# Altium PCB PCB_layer2.PcbDoc
Units mm, origin at the board's own origin, x right, y up, seen from the top; angles counter-clockwise.
Board outline 140.34 x 105.41 mm, 2 copper layers (Top Layer, Bottom Layer); 46 components, 0 nets, 202 pads, 95 vias.
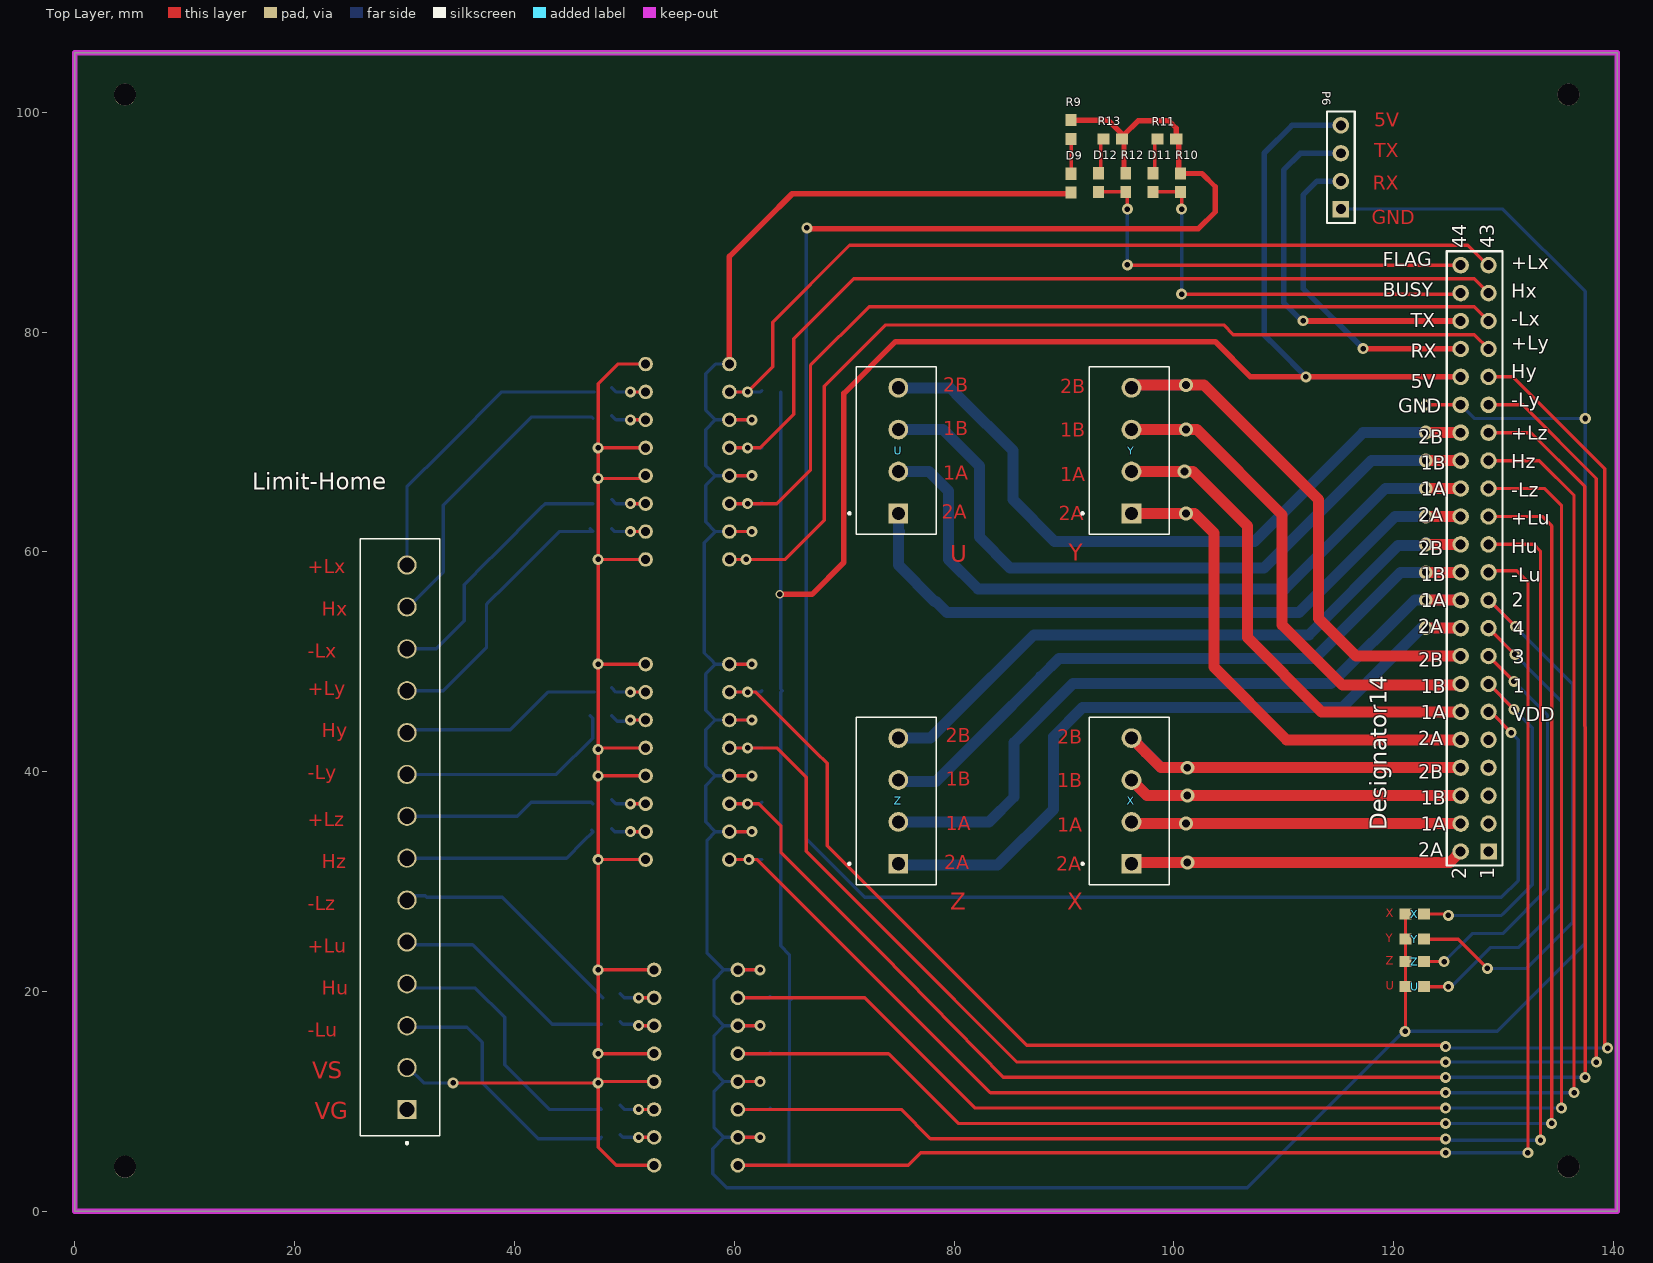
[diagram p0: Top Layer view]
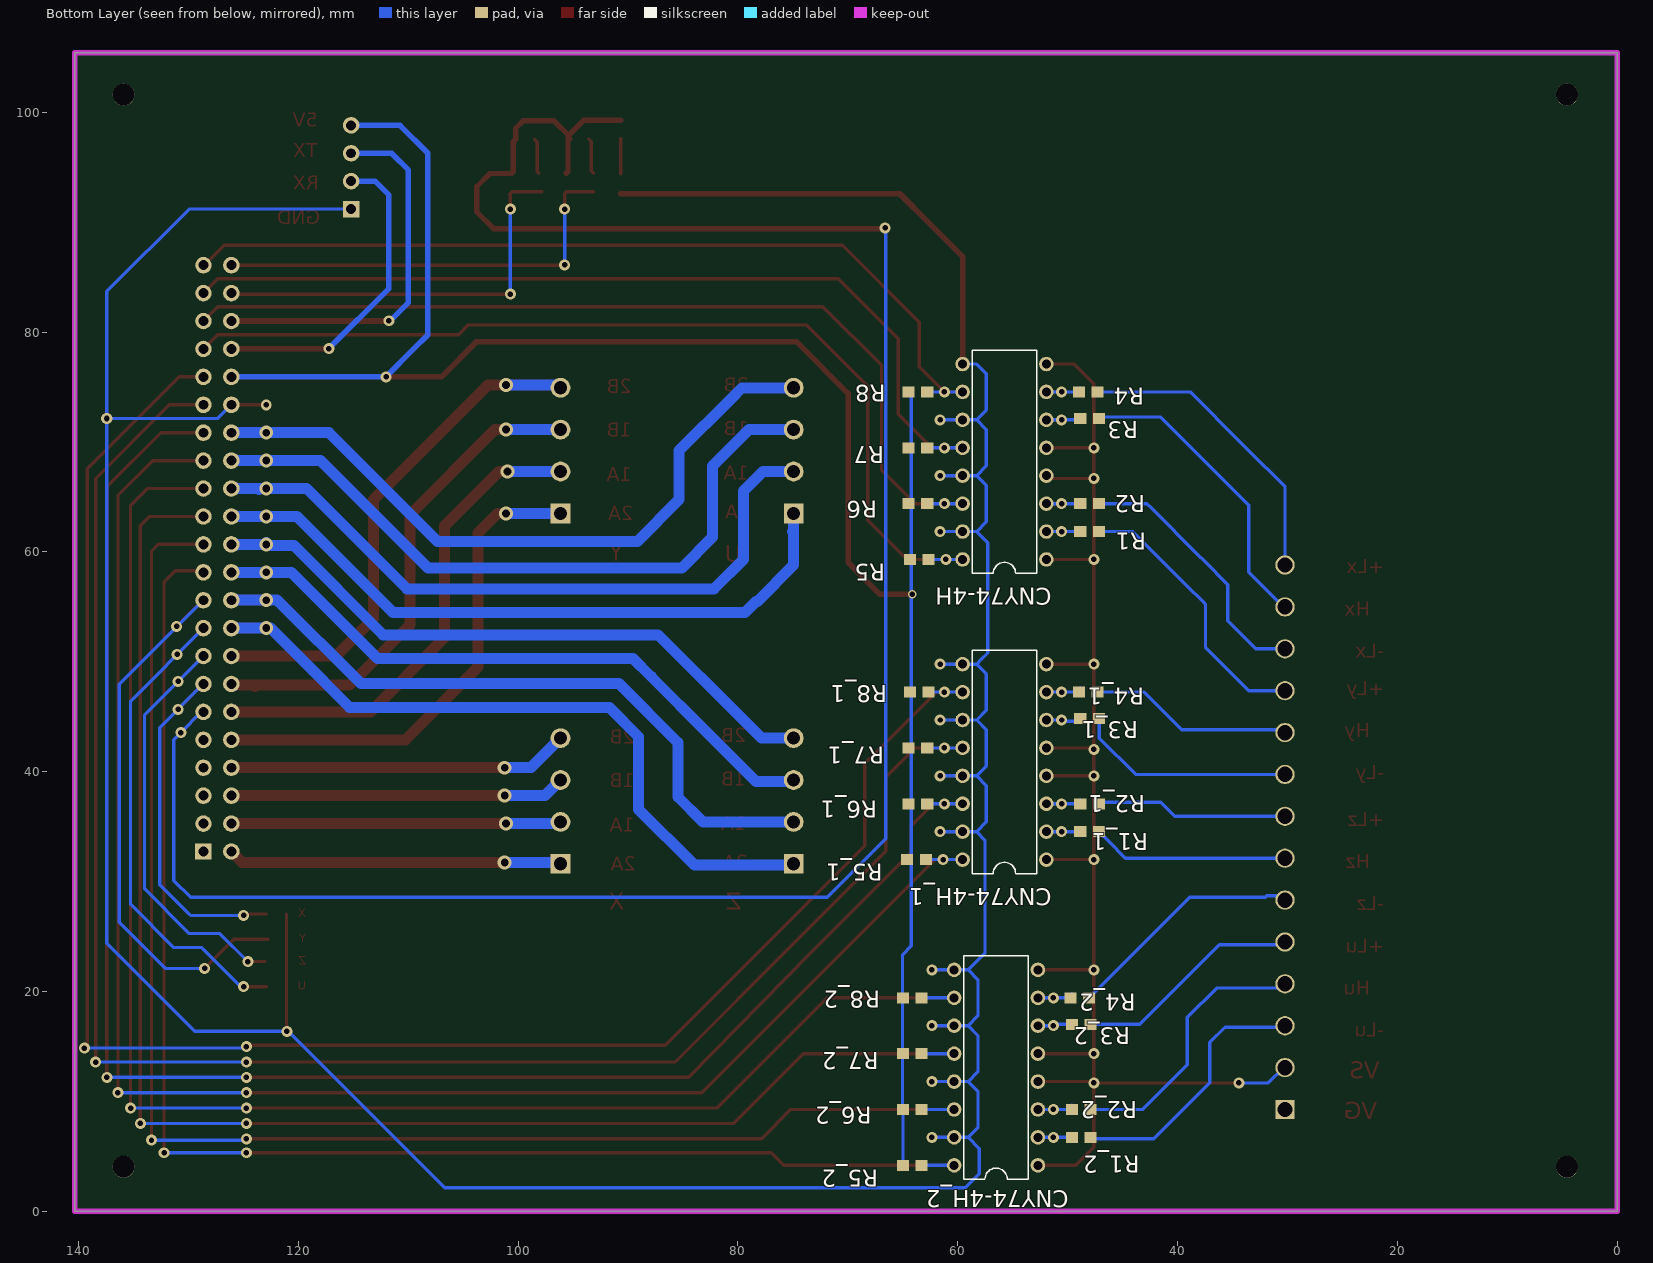
[diagram p1: Bottom Layer view, seen from below]

## Layer stack, top to bottom
Top Solder: solder mask 0.0102, Solder Resist, Dk 3.5
Top Layer: signal copper 0.0356
Dielectric 1: dielectric 0.32, FR-4, Dk 4.8
Bottom Layer: signal copper 0.0356
Bottom Solder: solder mask 0.0102, Solder Resist, Dk 3.5

## Board outline
0,0 140.335,0 140.335,105.41 0,105.41

## Design rules (kind name [scope] priority, off if disabled: settings)
Clearance [All] p1: gap=0.3 ignorepadtopadclearanceinfootprint=FALSE
PolygonConnect [All] p1: connectstyle=Relief reliefconductorwidth=0.254 reliefentries=4 polygonreliefangle="90 Angle" airgapwidth=0.254
RoutingVias [All] p1: holewidth=0.711 width=1.27 viastyle="Through Hole" minholewidth=0.5 minwidth=1 maxholewidth=0.711 maxwidth=1.3
ShortCircuit [All] p1: allowed=TRUE
SolderMaskExpansion [All] p1: expansion=0.102
Width [All] p1: maxlimit=1 minlimit=0.254 preferedwidth=0.254
29 further rules are at their usual default settings.

## Components (designator, comment, footprint, x,y, rotation, side; value= is the part's Value field where it differs from the comment)
CNY74-4H "Comment" DIL16 55.753,68.199 r0 bottom
CNY74-4H_1 "Comment" DIL16 55.753,40.894 r0 bottom
CNY74-4H_2 "Comment" DIL16 56.515,13.081 r0 bottom
D9 "ORANGE_LED" 0603 90.653,93.548 r90 top
D11 "YELLOW_LED" 0603 98.101,93.599 r90 top
D12 "RED_LED" 0603 93.135,93.599 r90 top
Designator14 "Comment" HDR2X22 128.626,32.741 r90 top
Limit-Home "Comment" TE_1-2342078-4 30.226,9.271 r90 top
P6 "Header 4" HDR1X4 115.189,91.186 r90 top
R1 "Comment" 0603 48.006,61.849 r0 bottom
R1_1 "Comment" 0603 48.006,34.544 r0 bottom
R1_2 "Comment" 0603 48.768,6.731 r0 bottom
R2 "Comment" 0603 48.006,64.389 r0 bottom
R2_1 "Comment" 0603 48.006,37.084 r0 bottom
R2_2 "Comment" 0603 48.768,9.271 r0 bottom
R3 "Comment" 0603 48.006,72.136 r0 bottom
R3_1 "Comment" 0603 48.006,44.831 r0 bottom
R3_2 "Comment" 0603 48.768,17.018 r0 bottom
R4 "Comment" 0603 48.133,74.549 r0 bottom
R4_1 "Comment" 0603 48.133,47.244 r0 bottom
R4_2 "Comment" 0603 48.895,19.431 r0 bottom
R5 "Comment" 0603 63.5,59.309 r0 bottom
R5_1 "Comment" 0603 63.754,32.004 r0 bottom
R5_2 "Comment" 0603 64.135,4.191 r0 bottom
R6 "Comment" 0603 63.627,64.389 r0 bottom
R6_1 "Comment" 0603 63.627,37.084 r0 bottom
R6_2 "Comment" 0603 64.135,9.271 r0 bottom
R7 "Comment" 0603 63.627,69.469 r0 bottom
R7_1 "Comment" 0603 63.627,42.164 r0 bottom
R7_2 "Comment" 0603 64.135,14.351 r0 bottom
R8 "Comment" 0603 63.627,74.549 r0 bottom
R8_1 "Comment" 0603 63.5,47.244 r0 bottom
R8_2 "Comment" 0603 64.135,19.431 r0 bottom
R9 "620" 0603 90.653,98.425 r90 top
R10 "39k" 0603 100.584,93.574 r90 top
R11 "620" 0603 99.365,97.55 r0 top
R12 "39k" 0603 95.618,93.599 r90 top
R13 "620" 0603 94.437,97.561 r0 top
U "Comment" TE_1776113-4 74.93,69.215 r90 top
U "RED_LED" 0603 121.92,20.447 r180 top (schematic designator D12)
X "Comment" TE_1776113-4 96.139,37.338 r90 top
X "RED_LED" 0603 121.92,27.051 r0 top (schematic designator D12)
Y "Comment" TE_1776113-4 96.139,69.215 r90 top
Y "RED_LED" 0603 121.92,24.765 r0 top (schematic designator D12)
Z "Comment" TE_1776113-4 74.93,37.338 r90 top
Z "RED_LED" 0603 121.92,22.733 r180 top (schematic designator D12)

## Footprints (in the part's own frame and the unit in brackets; to place one, negate y for a bottom-side part, rotate by r counter-clockwise, add the part's x,y. Pads: shape width x height; smd on the part's side, far side on the other; paste and mask are expansions set on the pad)
0603 [mm]
  rect 1.1x1 smd: 1(-0.85,0) 2(0.85,0)
DIL16 [mil]
  round 52 hole 32: 1(-150,350) 2(-150,250) 3(-150,150) 4(-150,50) 5(-150,-50) 6(-150,-150) 7(-150,-250) 8(-150,-350) 9(150,-350) 10(150,-250) 11(150,-150) 12(150,-50) 13(150,50) 14(150,150) 15(150,250) 16(150,350)
  silkscreen extent -115,-400 115,400
HDR1X4 [mm] "Connector; Header; 4 Position"
  rect 1.5x1.5 hole 0.9: 1(0,0)
  round 1.5 hole 0.9: 2(2.54,0) 3(5.08,0) 4(7.62,0)
  silkscreen extent -1.27,-1.27 8.89,1.27
HDR2X22 [mm] "Connector; Header; 22x2 Position"
  rect 1.5x1.5 hole 0.9: 1(0,0)
  round 1.5 hole 0.9: 2(0,2.54) 3(2.54,0) 4(2.54,2.54) 5(5.08,0) 6(5.08,2.54) 7(7.62,0) 8(7.62,2.54) 9(10.16,0) 10(10.16,2.54) 11(12.7,0) 12(12.7,2.54) 13(15.24,0) 14(15.24,2.54) 15(17.78,0) 16(17.78,2.54) 17(20.32,0) 18(20.32,2.54) 19(22.86,0) 20(22.86,2.54) 21(25.4,0) 22(25.4,2.54) 23(27.94,0) 24(27.94,2.54) 25(30.48,0) 26(30.48,2.54) 27(33.02,0) 28(33.02,2.54) 29(35.56,0) 30(35.56,2.54) 31(38.1,0) 32(38.1,2.54) 33(40.64,0) 34(40.64,2.54) 35(43.18,0) 36(43.18,2.54) 37(45.72,0) 38(45.72,2.54) 39(48.26,0) 40(48.26,2.54) 41(50.8,0) 42(50.8,2.54) 43(53.34,0) 44(53.34,2.54)
  silkscreen extent -1.27,-1.27 54.61,3.81
TE_1-2342078-4 [mm]
  rect 1.75x1.75 hole 1.4: 1(0,0)
  round 1.75 hole 1.4: 2(3.81,0) 3(7.62,0) 4(11.43,0) 5(15.24,0) 6(19.05,0) 7(22.86,0) 8(26.67,0) 9(30.48,0) 10(34.29,0) 11(38.1,0) 12(41.91,0) 13(45.72,0) 14(49.53,0)
  silkscreen extent -3.16,-3 51.93,4.25
TE_1776113-4 [mm]
  rect 1.8x1.8 hole 1.2: 1(-5.715,0)
  round 1.8 hole 1.2: 2(-1.905,0) 3(1.905,0) 4(5.715,0)
  silkscreen extent -7.61,-3.45 7.61,4.55

## Part data
D9 D11 D12 U X Y Z: library part LTST-C193KFKT-5A, "Orange 605nm LED Indication - Discrete 2V 0603 (1608 Metric)", Package="0603 Lite-On", Arrow_Electronics-Purchase-URL=https://snapeda.com/shop?store=Arrow+Electronics&id=641468, Availability=Good, DigiKey-Purchase-URL=https://snapeda.com/shop?store=DigiKey&id=641468, MF="Lite-On Inc.", Mouser-Purchase-URL=https://snapeda.com/shop?store=Mouser&id=641468, MP=LTST-C193KFKT-5A, Price=None, SnapEDA_Link=https://www.snapeda.com/parts/LTST-C193KFKT-5A/Lite-On%20Inc./view-part/641468/?ref=snap
P6: "Header, 4-Pin", LatestRevisionDate=17-Jul-2002, LatestRevisionNote="Re-released for DXP Platform.", Publisher="Altium Limited"
R9 R10 R11 R12 R13: library part RC0603FR-7W1KL, "Fixed Resistor, Metal Glaze/thick Film, 0.2W, 1000ohm, 50V, 1% +/-Tol, 200ppm/Cel, Surface Mount, 0603", Package="0603 Yageo", Availability=Unavailable, MF=Yageo, MP=RC0603FR-7W1KL, Price=None, SnapEDA_Link=https://www.snapeda.com/parts/RC0603FR-7W1KL/Yageo/view-part/1012814/?ref=snap

## Free pads (board coordinates)
  round 2 hole 2 unplated: 5(4.572,4.064) 5(4.572,101.6) 5(135.89,4.064) 5(135.89,101.6)

## Via types
v1: diameter 1, hole 0.5, Top Layer to Bottom Layer, 77 vias
v2: diameter 1.27, hole 0.711, Top Layer to Bottom Layer, 16 vias
v3: diameter 0.762, hole 0.51, Top Layer to Bottom Layer, 1 vias
v4: diameter 1.016, hole 0.508, Top Layer to Bottom Layer, 1 vias

## Nets (pads, with @x,y where several pads share a name; then routed paths per layer and width w, separated by ;. In a path a pad name is that pad's centre, name@x,y a point inside that pad or via, vN(x,y) a via of type N, cw(c..) or ccw(c..) an arc to the next point about the centre after c; other vN are vias at no path point)
pads on no net: CNY74-4H.1 CNY74-4H.2 CNY74-4H.3 CNY74-4H.4 CNY74-4H.5 CNY74-4H.6 CNY74-4H.7 CNY74-4H.8 CNY74-4H.9 CNY74-4H.10 CNY74-4H.11 CNY74-4H.12 CNY74-4H.13 CNY74-4H.14 CNY74-4H.15 CNY74-4H.16 CNY74-4H_1.1 CNY74-4H_1.2 CNY74-4H_1.3 CNY74-4H_1.4 CNY74-4H_1.5 CNY74-4H_1.6 CNY74-4H_1.7 CNY74-4H_1.8 CNY74-4H_1.9 CNY74-4H_1.10 CNY74-4H_1.11 CNY74-4H_1.12 CNY74-4H_1.13 CNY74-4H_1.14 CNY74-4H_1.15 CNY74-4H_1.16 CNY74-4H_2.1 CNY74-4H_2.2 CNY74-4H_2.3 CNY74-4H_2.4 CNY74-4H_2.5 CNY74-4H_2.6 CNY74-4H_2.7 CNY74-4H_2.8 CNY74-4H_2.9 CNY74-4H_2.10 CNY74-4H_2.11 CNY74-4H_2.12 CNY74-4H_2.13 CNY74-4H_2.14 CNY74-4H_2.15 CNY74-4H_2.16 D9.1 D9.2 D11.1 D11.2 D12.1 D12.2 Designator14.1 Designator14.2 Designator14.3 Designator14.4 Designator14.5 Designator14.6 Designator14.7 Designator14.8 Designator14.9 Designator14.10 Designator14.11 Designator14.12 Designator14.13 Designator14.14 Designator14.15 Designator14.16 Designator14.17 Designator14.18 Designator14.19 Designator14.20 Designator14.21 Designator14.22 Designator14.23 Designator14.24 Designator14.25 Designator14.26 Designator14.27 Designator14.28 Designator14.29 Designator14.30 Designator14.31 Designator14.32 Designator14.33 Designator14.34 Designator14.35 Designator14.36 Designator14.37 Designator14.38 Designator14.39 Designator14.40 Designator14.41 Designator14.42 Designator14.43 Designator14.44 Limit-Home.1 Limit-Home.2 Limit-Home.3 Limit-Home.4 Limit-Home.5 Limit-Home.6 Limit-Home.7 Limit-Home.8 Limit-Home.9 Limit-Home.10 Limit-Home.11 Limit-Home.12 Limit-Home.13 Limit-Home.14 P6.1 P6.2 P6.3 P6.4 R1.1 R1.2 R1_1.1 R1_1.2 R1_2.1 R1_2.2 R2.1 R2.2 R2_1.1 R2_1.2 R2_2.1 R2_2.2 R3.1 R3.2 R3_1.1 R3_1.2 R3_2.1 R3_2.2 R4.1 R4.2 R4_1.1 R4_1.2 R4_2.1 R4_2.2 R5.1 R5.2 R5_1.1 R5_1.2 R5_2.1 R5_2.2 R6.1 R6.2 R6_1.1 R6_1.2 R6_2.1 R6_2.2 R7.1 R7.2 R7_1.1 R7_1.2 R7_2.1 R7_2.2 R8.1 R8.2 R8_1.1 R8_1.2 R8_2.1 R8_2.2 R9.1 R9.2 R10.1 R10.2 R11.1 R11.2 R12.1 R12.2 R13.1 R13.2 U.1 U.2 U.3 U.4 X.1 X.2 X.3 X.4 Y.1 Y.2 Y.3 Y.4 Z.1 Z.2 Z.3 Z.4
copper on no net: | length 3988.1
  Top Layer w0.3: v1@34.29,11.684 v1(47.625,11.684) 47.752,11.811 48.133,11.811 52.705,11.811 ; v1(47.625,14.351) 48.133,14.351 52.705,14.351 ; v1(47.625,21.971) 48.133,21.971 52.705,21.971 ; v1(47.625,32.004) 48.006,32.004 48.133,32.004 51.943,32.004 ; v1@47.625,39.751 47.752,39.624 48.26,39.624 51.943,39.624 ; v1@47.625,42.164 48.133,42.164 51.943,42.164 ; v1(47.625,49.784) 48.133,49.784 51.943,49.784 ; v1(47.625,59.309) 48.133,59.309 51.943,59.309 ; v1(47.625,66.675) 49.149,66.675 ; v1@47.625,69.596 47.752,69.469 48.768,69.469 51.943,69.469 ; 49.022,66.675 49.276,66.675 51.689,66.675 51.943,66.929 ; v1(50.546,34.544) 51.943,34.544 ; v1(50.546,37.084) 51.943,37.084 ; v1(50.546,44.704) 51.943,44.704 ; v1(50.546,47.244) 51.943,47.244 ; v1(50.546,61.849) 51.943,61.849 ; v1(50.546,64.389) 51.943,64.389 ; v1(50.546,72.009) 51.943,72.009 ; v1(50.546,74.549) 51.943,74.549 ; v1(51.308,6.731) 52.705,6.731 ; v1(51.308,9.271) 52.705,9.271 ; v1(51.308,16.891) 52.705,16.891 ; v1(51.308,19.431) 52.705,19.431 ; 51.943,77.089 49.403,77.089 47.625,75.311 47.625,68.072 47.625,5.842 49.276,4.191 51.435,4.191 52.705,4.191 ; 59.563,32.004 62.103,32.004 71.882,22.225 83.312,10.795 v1(124.714,10.795) ; 59.563,34.544 v1(61.595,34.544) ; 59.563,37.084 62.23,37.084 64.262,35.052 64.262,32.639 71.882,25.019 73.406,23.495 84.455,12.192 v1(124.714,12.192) ; 59.563,39.624 v1(61.595,39.624) ; 59.563,42.164 63.881,42.164 66.548,39.497 66.548,32.766 74.422,24.892 85.725,13.589 v1(124.714,13.589) ; 59.563,44.704 v1(61.595,44.704) ; 59.563,47.244 61.976,47.244 67.437,41.783 68.453,40.767 68.453,33.274 75.438,26.289 86.614,15.113 ; 59.563,49.784 v1(61.595,49.784) ; 59.563,59.309 64.643,59.309 68.199,62.865 68.199,75.057 73.787,80.645 104.521,80.645 105.41,79.756 122.428,79.756 127,79.756 127.33,79.756 128.626,78.461 ; 59.563,61.849 v1(61.595,61.849) ; 59.563,64.389 63.881,64.389 64.262,64.77 66.929,67.437 66.929,76.962 72.263,82.296 105.283,82.296 106.299,82.296 113.284,82.296 127.33,82.296 128.626,81.001 ; 59.563,66.929 v1(61.595,66.929) ; 59.563,69.469 62.357,69.469 63.5,70.612 65.405,72.517 65.405,79.375 70.866,84.836 105.664,84.836 120.396,84.836 127.254,84.836 127.33,84.836 128.626,83.541 ; 59.563,72.009 v1(61.595,72.009) ; 59.563,74.549 v1(61.214,74.549) 63.5,76.835 63.5,80.899 70.485,87.884 106.68,87.884 126.746,87.884 128.549,86.081 128.626,86.081 ; 60.325,4.191 63.627,4.191 75.819,4.191 76.962,5.334 109.601,5.334 ; 60.325,6.731 v1(62.357,6.731) ; 60.325,9.271 75.184,9.271 77.851,6.604 107.823,6.604 108.331,6.604 v1(124.714,6.604) ; 60.325,11.811 v1(62.357,11.811) ; 60.325,14.351 64.135,14.351 74.041,14.351 79.883,8.509 80.391,8.001 v1(124.714,8.001) ; 60.325,16.891 v1(62.357,16.891) ; 60.325,19.431 71.882,19.431 80.645,10.668 81.28,10.033 81.915,9.398 v1(124.714,9.398) ; 60.325,21.971 v1(62.357,21.971) ; 86.36,15.367 86.614,15.113 ; 90.653,94.398 90.653,97.575 ; 93.135,92.749 95.618,92.749 95.758,92.609 95.758,91.818 v1(95.758,91.186) ; 93.135,94.449 93.345,94.659 93.345,97.319 93.587,97.561 ; v1@95.758,86.081 126.086,86.081 ; 97.854,92.749 98.101,92.749 100.559,92.749 100.584,92.724 ; 98.101,94.449 98.247,94.595 98.247,97.283 98.515,97.55 ; v1(100.711,83.439) 101.727,83.439 125.984,83.439 126.086,83.541 ; v1(100.711,91.186) 100.711,92.597 100.584,92.724 ; 100.711,92.456 100.781,92.526 100.584,92.724 ; 109.22,5.334 110.744,5.334 v1(124.714,5.334) ; v1@121.07,16.383 121.07,20.447 121.07,22.733 121.07,24.765 121.07,27.051 ; 122.77,24.765 125.857,24.765 v1(128.524,22.098) ; 122.897,20.447 123.828,20.447 v1(124.968,20.447) ; 122.897,27.051 123.952,27.051 124.841,27.051 v1(124.968,26.924) ; v1(122.911,73.381) 126.086,73.381 ; 123.024,22.733 123.901,22.733 v1(124.587,22.733) ; v1(124.714,14.986) 124.587,15.113 89.662,15.113 86.614,15.113 ; 128.422,65.761 133.756,65.761 135.255,64.262 135.255,19.467 135.255,10.668 v1(135.255,9.398) ; 128.499,60.681 132.74,60.681 133.35,60.071 133.35,16.564 v1(133.35,6.477) ; 128.626,45.314 128.626,45.441 128.803,45.441 v1(130.683,43.561) ; 128.626,47.981 v1(130.937,45.669) ; 128.626,50.521 v1(130.937,48.209) ; 128.626,53.061 130.886,50.8 v1@131.064,50.8 ; 128.626,55.601 128.676,55.601 v1(131.064,53.213) ; 128.626,62.84 128.626,63.221 133.502,63.221 134.366,62.357 134.366,20.477 v1(134.366,8.001) ; 128.626,68.301 133.248,68.301 136.398,65.151 136.398,23.531 136.398,20.066 136.398,12.192 v1(136.398,10.795) ; 128.626,70.841 132.486,70.841 137.374,65.953 137.414,22.236 137.414,13.462 v1(137.414,12.192) ; 128.626,73.381 129.819,73.381 131.724,73.381 138.43,66.675 138.43,65.227 v1(138.43,13.589) ; 128.753,75.921 130.835,75.921 139.192,67.564 139.192,26.416 139.192,15.113 v1(139.446,14.859) ; 128.778,58.293 131.191,58.293 132.207,57.277 132.207,6.731 v1(132.207,5.334)
  Top Layer w0.48: v1@66.675,89.408 102.235,89.408 103.759,90.932 103.759,93.218 102.553,94.424 100.584,94.424 100.432,94.576 100.432,97.334 100.215,97.55 100.215,98.54 99.543,99.212 96.723,99.212 95.453,97.942 95.453,97.839 ; 90.653,99.275 94.017,99.275 95.453,97.839 ; 95.287,97.561 95.453,97.727 ; 95.618,94.449 95.453,94.614 95.453,97.727 ; 95.453,97.727 95.453,97.839
  Top Layer w0.508: 59.563,77.089 59.563,78.74 59.563,86.868 62.738,90.043 65.278,92.583 84.758,92.583 90.653,92.583 ; v3(64.135,56.134) 67.056,56.134 69.977,59.055 69.977,74.422 74.676,79.121 103.759,79.121 106.959,75.921 126.086,75.921 ; v1@111.76,81.001 126.086,81.001 ; v1@117.221,78.461 119.45,78.461 126.086,78.461
  Top Layer w1: 96.139,31.623 96.266,31.75 97.917,31.75 125.095,31.75 126.086,32.741 ; 96.139,35.433 96.291,35.281 126.086,35.281 125.984,35.179 ; 96.139,39.243 97.561,37.821 102.514,37.821 126.086,37.821 ; 96.139,43.053 97.436,41.756 98.831,40.361 126.086,40.361 ; 96.139,63.5 101.854,63.5 103.632,61.722 103.632,49.53 110.261,42.901 126.086,42.901 125.984,42.799 ; 96.139,67.31 99.06,67.31 101.727,67.31 106.68,62.357 106.68,52.197 113.436,45.441 126.086,45.441 125.984,45.339 ; 96.139,71.12 102.108,71.12 109.855,63.373 109.855,53.34 115.316,47.879 123.825,47.879 ; 96.139,74.93 96.393,75.184 102.743,75.184 113.157,64.77 113.157,53.924 116.561,50.521 126.086,50.521 ; v2(122.911,53.061) 126.086,53.061 ; v2(122.911,55.601) 126.086,55.601 ; v2(122.911,58.141) 126.086,58.141 ; v2(122.911,60.681) 126.086,60.681 ; v2(122.911,63.221) 126.086,63.221 ; v2(122.911,65.761) 126.086,65.761 ; v2(122.911,68.301) 126.086,68.301 ; v2(122.911,70.841) 126.086,70.841 ; 123.952,47.752 123.825,47.879 ; 126.086,47.981 125.984,47.879 123.825,47.879
  Bottom Layer w0.3: 30.226,13.081 30.353,13.081 31.75,11.684 33.147,11.684 v1(34.417,11.684) ; 30.226,16.891 30.353,16.764 35.687,16.764 37.084,15.367 37.084,11.684 42.164,6.604 46.355,6.604 47.791,6.604 47.918,6.731 ; 30.226,20.701 30.607,20.32 36.449,20.32 39.116,17.653 39.116,17.145 39.116,13.335 43.18,9.271 47.918,9.271 47.791,9.398 ; 30.226,24.511 30.48,24.257 36.068,24.257 36.195,24.257 36.576,23.876 43.434,17.018 47.918,17.018 47.625,17.018 ; 30.226,28.321 30.607,28.702 31.877,28.702 32.004,28.575 36.83,28.575 37.465,28.575 38.901,28.575 48.045,19.431 ; 30.226,32.131 37.846,32.131 44.743,32.131 46.275,33.663 47.156,34.544 47.029,34.671 ; 30.226,35.941 39.37,35.941 40.259,35.941 41.529,37.211 46.99,37.211 47.117,37.084 47.156,37.084 ; 30.226,39.751 43.815,39.751 47.117,43.053 47.117,44.792 47.156,44.831 46.902,45.085 ; 30.226,43.561 30.48,43.815 32.258,43.815 39.624,43.815 43.053,47.244 43.434,47.244 47.283,47.244 ; 30.226,47.371 33.528,47.371 37.465,51.308 37.465,55.245 37.592,55.372 39.243,57.023 44.069,61.849 45.085,61.849 47.156,61.849 46.902,62.103 ; 30.226,51.181 32.893,51.181 35.433,53.721 35.433,57.023 37.592,59.182 38.1,59.69 42.418,64.008 42.799,64.389 47.156,64.389 ; 30.226,54.991 30.353,54.991 31.369,56.007 33.528,58.166 33.528,64.262 36.195,66.929 41.529,72.263 45.593,72.263 47.029,72.263 47.156,72.136 ; 30.226,58.801 30.226,65.913 33.655,69.342 34.163,69.85 38.862,74.549 45.466,74.549 47.283,74.549 ; 48.856,34.798 49.11,34.544 50.419,34.544 51.943,34.544 ; 48.856,37.465 49.237,37.084 51.054,37.084 51.943,37.084 ; 48.856,45.085 49.364,44.577 50.546,44.577 50.673,44.704 51.943,44.704 ; 48.856,47.625 49.237,47.244 50.673,47.244 51.943,47.244 ; 48.856,62.103 49.11,61.849 50.419,61.849 51.943,61.849 ; 48.856,64.77 49.237,64.389 51.054,64.389 51.943,64.389 ; 48.856,72.39 49.237,72.009 49.657,72.009 50.673,72.009 51.943,72.009 ; 48.856,74.93 49.237,74.549 50.673,74.549 51.943,74.549 ; 49.618,6.985 49.872,6.731 51.181,6.731 52.705,6.731 ; 49.618,9.652 49.999,9.271 51.816,9.271 52.705,9.271 ; 49.618,17.272 49.872,17.018 51.562,17.018 51.689,16.891 52.705,16.891 ; 49.618,19.812 49.999,19.431 51.435,19.431 52.705,19.431 ; 59.182,66.929 59.563,66.929 ; 59.436,59.182 59.563,59.309 ; 59.55,59.309 60.592,59.309 v1@61.328,59.309 ; 59.563,32.004 60.604,32.004 v1(61.341,32.004) ; 59.563,37.084 60.706,37.084 62.396,37.084 62.523,37.211 ; 59.563,42.164 v1(61.214,42.164) 62.523,42.164 ; 59.563,47.244 v1(61.214,47.244) 62.396,47.244 62.523,47.371 ; 59.563,64.389 60.706,64.389 62.396,64.389 62.523,64.516 ; 59.563,69.469 v1(61.214,69.469) 62.523,69.469 ; 59.563,74.549 v1(61.214,74.549) 62.396,74.549 62.523,74.676 ; 59.563,77.089 58.293,77.089 57.404,76.2 57.404,72.898 58.293,72.009 ; 60.198,4.064 60.325,4.191 61.976,4.191 63.158,4.191 ; 60.325,9.271 61.468,9.271 63.158,9.271 63.285,9.398 ; 60.325,14.351 61.976,14.351 63.158,14.351 63.285,14.478 ; 60.325,19.431 61.976,19.431 63.158,19.431 63.285,19.558 ; 60.452,22.098 60.325,21.971 ; v1@61.201,59.309 62.51,59.309 ; v1@61.214,32.004 62.523,32.004 ; v1(61.595,34.544) 59.563,34.544 58.293,34.544 ; v1(61.595,39.624) 59.563,39.624 58.293,39.624 ; v1(61.595,44.704) 59.563,44.704 58.293,44.704 ; v1(61.595,49.784) 59.563,49.784 58.293,49.784 ; v1(61.595,61.849) 59.563,61.849 58.293,61.849 ; v1(61.595,66.929) 59.563,66.929 ; v1(61.595,72.009) 59.563,72.009 58.293,72.009 ; v1(62.357,6.731) 60.325,6.731 59.055,6.731 ; v1(62.357,11.811) 60.325,11.811 59.055,11.811 ; v1(62.357,16.891) 60.325,16.891 ; v1(62.357,21.971) 60.325,21.971 ; 64.223,47.244 64.223,46.267 64.223,44.704 64.223,37.084 64.223,35.726 64.223,34.544 64.223,24.169 65.024,23.368 65.024,20.828 65.024,19.47 ; 64.223,74.549 64.223,73.318 ; 64.262,73.279 64.223,73.318 ; 64.389,47.371 64.223,47.537 64.223,61.849 64.223,62.904 64.223,64.389 64.223,72.009 64.223,73.318 ; 64.985,4.191 64.985,7.962 64.985,9.271 ; 64.985,9.144 65.024,9.183 65.024,16.93 65.024,17.78 65.024,19.392 64.985,19.431 65.024,19.47 ; 65.19,19.304 65.024,19.47 ; v1@66.548,89.535 66.548,33.909 71.882,28.575 128.27,28.575 129.794,28.575 131.318,30.099 131.318,42.926 v1(130.683,43.561) 128.803,45.441 128.626,45.441 ; v1(95.758,86.106) v1(95.758,91.186) ; v1(100.711,91.186) v1(100.711,83.439) v1@100.838,83.312 ; 114.554,96.139 114.681,96.266 ; 115.189,91.186 129.921,91.186 137.414,83.693 v4(137.414,72.136) ; v1(124.587,22.733) 127.127,25.273 128.397,25.273 129.921,25.273 130.048,25.4 133.985,29.337 133.985,30.48 133.985,45.161 128.626,50.521 ; v1(124.714,5.334) v1(132.207,5.334) ; v1(124.714,6.604) 124.841,6.477 131.699,6.477 v1(133.35,6.477) ; v1(124.714,8.001) v1(134.366,8.001) ; v1(124.714,9.398) 133.985,9.398 v1(135.255,9.398) ; v1(124.714,10.795) v1(136.398,10.795) ; v1(124.714,12.192) v1(137.414,12.192) ; v1(124.714,13.589) v1(138.43,13.589) ; v1(124.714,14.986) 124.841,14.859 138.176,14.859 v1(139.446,14.859) ; v1(124.968,20.447) 125.222,20.447 128.778,24.003 130.683,24.003 131.318,24.003 135.255,27.94 135.255,46.431 128.626,53.061 ; v1(124.968,26.924) 129.794,26.924 129.921,27.051 132.588,29.718 132.588,34.925 132.588,44.018 128.626,47.981 ; 125.679,78.359 125.832,78.207 ; 126.086,73.381 127.33,72.136 v4(137.414,72.136) ; v1(128.524,22.098) 132.08,22.098 136.271,26.289 136.271,47.955 128.626,55.601 ; 128.651,86.106 128.626,86.081 128.905,86.36 ; 58.293,34.544 57.404,35.433 57.404,38.735 58.293,39.624 ; 58.293,34.544 57.531,33.782 57.531,33.274 57.531,23.495 57.912,23.114 58.42,22.606 59.055,21.971 ; 58.293,39.624 57.404,40.513 57.404,43.815 58.293,44.704 ; 58.293,44.704 57.404,45.593 57.404,48.895 58.293,49.784 ; 58.293,49.784 57.912,50.165 57.277,50.8 57.277,60.833 58.293,61.849 ; 58.293,61.849 57.404,62.738 57.404,66.04 58.293,66.929 ; 58.293,66.929 59.563,66.929 ; 58.293,66.929 57.404,67.818 57.404,71.12 58.293,72.009 ; 59.055,6.731 58.166,7.62 58.166,10.922 59.055,11.811 ; 59.055,6.731 58.039,5.715 58.039,3.429 59.309,2.159 106.68,2.159 121.031,16.51 121.158,16.383 129.159,16.383 129.413,16.383 137.414,24.384 v4(137.414,72.136) ; 59.055,11.811 58.166,12.7 58.166,16.002 59.055,16.891 ; 59.055,16.891 58.166,17.78 58.166,21.082 59.055,21.971 ; 59.055,16.891 60.325,16.891 ; 59.055,16.891 60.325,16.891 ; 59.055,21.971 60.325,21.971
  Bottom Layer w0.508: v1@111.709,80.95 109.982,82.677 109.982,94.742 111.506,96.266 115.189,96.266 ; 115.189,93.726 113.03,93.726 111.76,92.456 111.76,91.313 111.76,83.947 v1(117.221,78.486) ; 115.189,98.806 110.744,98.806 108.204,96.266 108.204,79.756 109.474,78.486 112.039,75.921 126.086,75.921 125.984,75.819 ; 125.984,73.279 126.086,73.381
  Bottom Layer w1: 74.93,31.623 75.057,31.496 77.724,31.496 83.947,31.496 89.027,36.576 89.027,43.18 91.694,45.847 115.316,45.847 119.888,50.419 122.53,53.061 126.035,53.061 126.06,53.086 ; 74.93,35.433 83.185,35.433 85.471,37.719 85.471,42.672 90.805,48.006 114.3,48.006 121.92,55.626 ; 74.93,39.243 75.057,39.116 76.584,39.116 78.359,39.116 80.772,41.529 82.804,43.561 87.884,48.641 89.535,50.292 112.776,50.292 120.625,58.141 126.086,58.141 ; 74.93,43.053 77.851,43.053 79.756,44.958 87.249,52.451 89.662,52.451 112.268,52.451 120.396,60.579 122.657,60.579 v2@122.911,60.833 ; 74.93,63.5 74.93,61.719 ; 74.93,67.31 77.724,67.31 79.502,65.532 79.502,59.309 82.169,56.642 110.109,56.642 119.253,65.786 v2@123.444,65.786 ; 74.93,71.12 76.708,71.12 78.74,71.12 78.994,71.12 82.296,67.818 82.296,61.341 85.09,58.547 108.204,58.547 117.958,68.301 118.593,68.301 126.086,68.301 ; 74.93,74.93 79.629,74.93 80.645,73.914 85.344,69.215 85.344,64.77 89.154,60.96 107.315,60.96 117.221,70.866 123.444,70.866 125.857,70.866 126.111,70.612 ; 75.057,61.846 74.93,61.719 ; 96.139,35.306 v2@101.092,35.306 ; 96.139,39.243 97.536,37.846 v2(101.219,37.846) ; 96.139,43.053 98.806,40.386 v2@101.219,40.386 ; 96.139,63.5 v2(101.092,63.5) ; 96.139,67.31 v2(100.965,67.31) ; 96.139,71.12 98.171,71.12 v2(101.092,71.12) ; 96.139,74.93 96.139,75.057 96.266,75.184 97.917,75.184 v2(101.092,75.184) ; 96.266,31.75 v2(101.219,31.75) ; 122.174,55.626 121.92,55.626 ; v2(122.911,60.681) 126.086,60.681 125.984,60.579 ; 123.571,65.659 v2@123.444,65.786 ; 125.92,47.816 126.086,47.981 ; 125.991,70.935 126.086,70.841 ; 126.06,45.466 126.086,45.441 ; 126.086,55.601 126.06,55.626 121.92,55.626 ; 126.086,63.221 120.117,63.221 111.379,54.483 79.375,54.483 78.359,55.499 78.232,55.499 74.93,58.801 74.93,61.719 ; 126.086,65.761 126.06,65.786 v2@123.444,65.786
  other v1: 121.031,16.383 61.214,37.084 47.625,39.624 47.625,42.037 131.013,50.673 61.087,59.309 61.214,64.389 47.625,69.469 112.014,75.921 111.76,81.026 66.611,89.471
  other v2: 101.092,35.281 101.219,40.361

## Keep-outs
Keep-Out Layer:
  the board outline again, w0.5

## Other copper
Top Layer:
  text "5V" at 118.237,98.679 h1.27
  text "TX" at 118.237,95.885 h1.27
  text "RX" at 118.11,92.964 h1.27
  text "GND" at 117.983,89.789 h1.27
  text "2B" at 78.994,74.549 h1.27
  text "2B" at 89.662,74.422 h1.27
  text "1B" at 78.994,70.612 h1.27
  text "1B" at 89.662,70.485 h1.27
  text "1A" at 78.994,66.548 h1.27
  text "1A" at 89.662,66.421 h1.27
  text "2A" at 78.867,62.992 h1.27
  text "2A" at 89.535,62.865 h1.27
  text "+Lx" at 21.209,58.039 h1.27
  text "Hx" at 22.479,54.206 h1.27
  text "-Lx" at 21.209,50.373 h1.27
  text "+Ly" at 21.209,46.963 h1.27
  text "Hy" at 22.479,43.13 h1.27
  text "2B" at 79.248,42.672 h1.27
  text "2B" at 89.408,42.545 h1.27
  text "-Ly" at 21.209,39.297 h1.27
  text "1B" at 79.248,38.735 h1.27
  text "1B" at 89.408,38.608 h1.27
  text "+Lz" at 21.209,35.04 h1.27
  text "1A" at 79.248,34.671 h1.27
  text "1A" at 89.408,34.544 h1.27
  text "Hz" at 22.479,31.207 h1.27
  text "2A" at 79.121,31.115 h1.27
  text "2A" at 89.281,30.988 h1.27
  text "-Lz" at 21.209,27.374 h1.27
  text "+Lu" at 21.209,23.541 h1.27
  text "Hu" at 22.479,19.708 h1.27
  text "-Lu" at 21.209,15.875 h1.27
  text "VS" at 21.59,12.065 h1.52
  text "VG" at 21.844,8.382 h1.52

## Silkscreen, mask and mechanical layers (free items; w line width, h text height)
Top Overlay:
  text "FLAG" at 118.999,85.979 h1.27
  text "+Lx" at 130.683,85.725 h1.27
  text "BUSY" at 118.999,83.21 h1.27
  text "Hx" at 130.683,83.139 h1.27
  text "-Lx" at 130.683,80.553 h1.27
  text "TX" at 121.539,80.442 h1.27
  text "+Ly" at 130.683,78.39 h1.27
  text "RX" at 121.539,77.673 h1.27
  text "Hy" at 130.683,75.803 h1.27
  text "5V" at 121.539,74.905 h1.27
  text "-Ly" at 130.683,73.217 h1.27
  text "GND" at 120.396,72.644 h1.27
  text "+Lz" at 130.683,70.208 h1.27
  text "2B" at 122.247,69.85 h1.27
  text "Hz" at 130.683,67.622 h1.27
  text "1B" at 122.459,67.479 h1.27
  text "1A" at 122.459,65.109 h1.27
  text "-Lz" at 130.683,65.036 h1.27
  text "2A" at 122.247,62.738 h1.27
  text "+Lu" at 130.683,62.449 h1.27
  text "Hu" at 130.683,59.863 h1.27
  text "2B" at 122.247,59.69 h1.27
  text "1B" at 122.459,57.319 h1.27
  text "-Lu" at 130.683,57.277 h1.27
  text "2" at 130.756,54.991 h1.27
  text "1A" at 122.459,54.949 h1.27
  text "2A" at 122.247,52.578 h1.27
  text "4" at 130.81,52.428 h1.27
  text "3" at 130.81,49.811 h1.27
  text "2B" at 122.247,49.53 h1.27
  text "1" at 130.81,47.194 h1.27
  text "1B" at 122.459,47.159 h1.27
  text "1A" at 122.459,44.789 h1.27
  text "VDD" at 130.81,44.577 h1.27
  text "2A" at 122.247,42.418 h1.27
  text "2B" at 122.247,39.37 h1.27
  text "1B" at 122.459,36.999 h1.27
  text "1A" at 122.459,34.629 h1.27
  text "2A" at 122.247,32.258 h1.27

## Text inside footprints (layer, text, board x,y; h text height)
Designator14: Top Overlay "44" at 126.594,87.605 h1.27 r90; Top Overlay "1" at 129.134,30.201 h1.27 r90; Top Overlay "2" at 126.594,30.201 h1.27 r90; Top Overlay "43" at 129.134,87.605 h1.27 r90